# Altium PCB Pulse_plus_gen.PcbDoc
Units mil, origin at the board's own origin, x right, y up, seen from the top; angles counter-clockwise.
Board outline 3152.56 x 2155.51 mil, 2 copper layers (Top Layer, Bottom Layer); 20 components, 6 nets, 48 pads, 78 vias.
Unrouted connection lines stored in the file: 15.
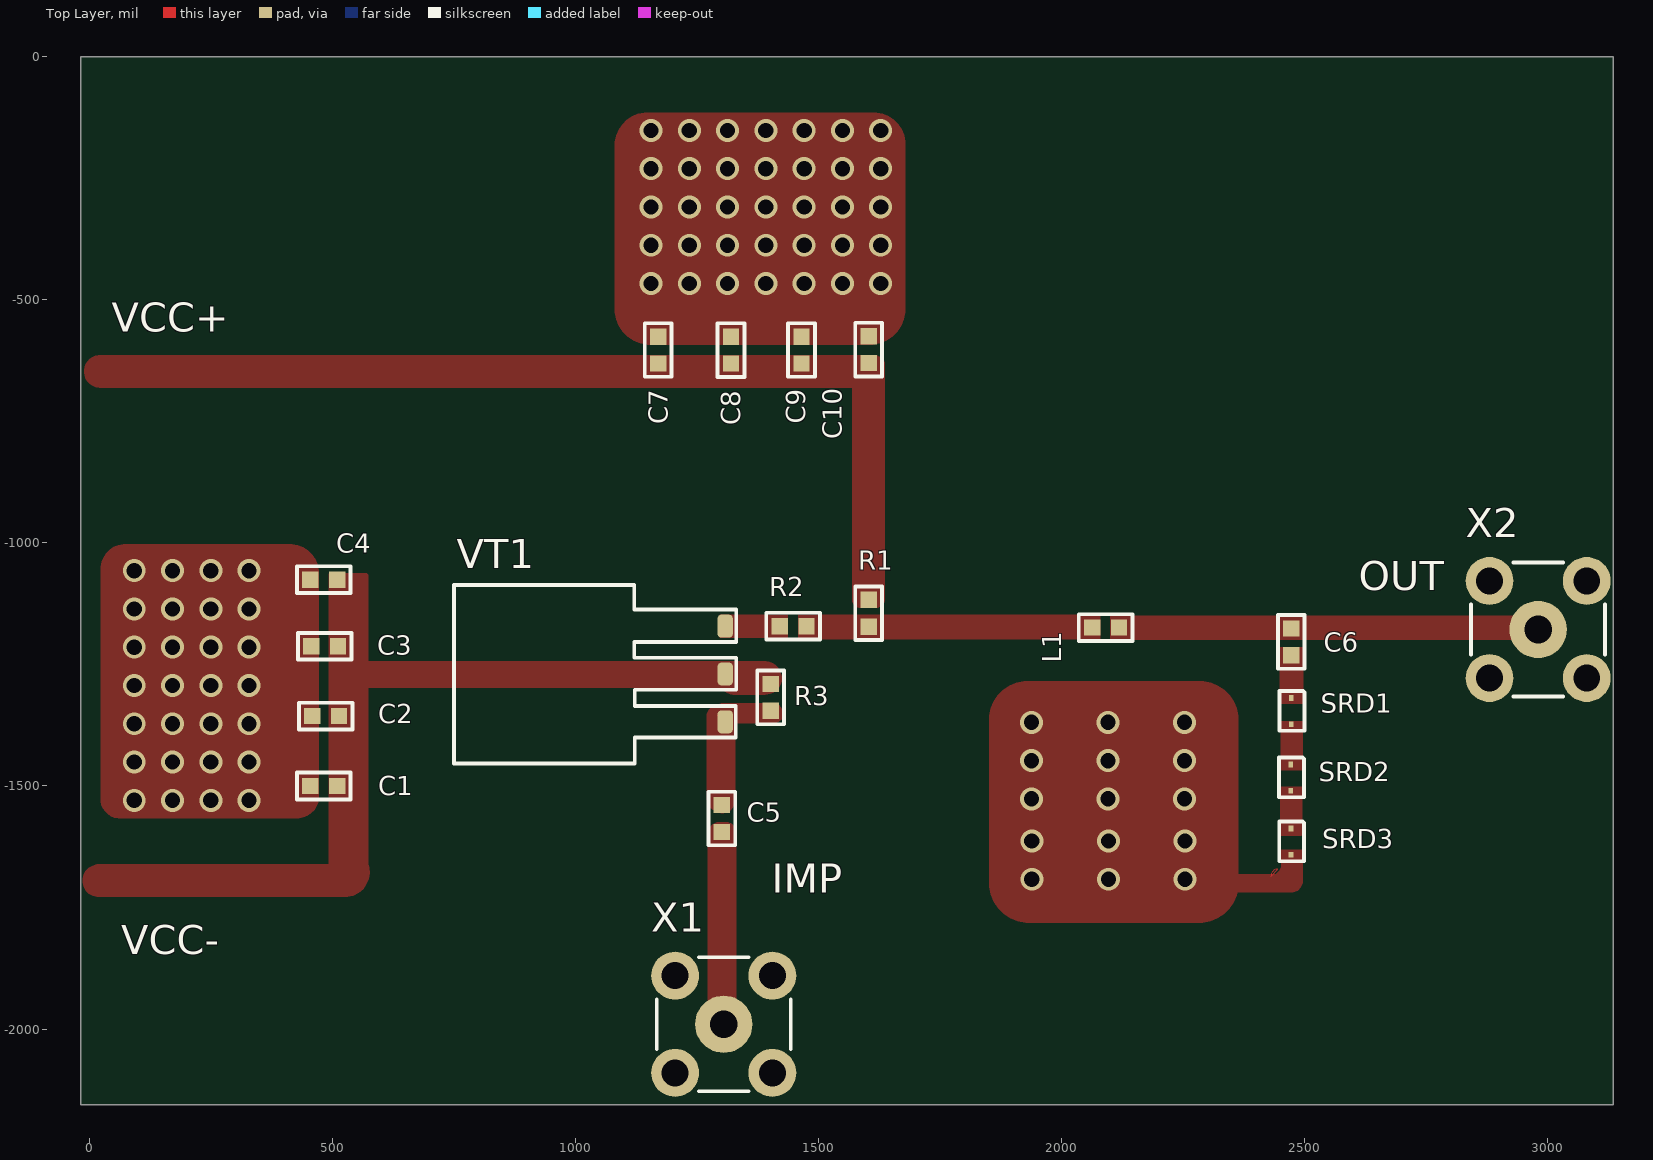
[diagram p0: Top Layer view]
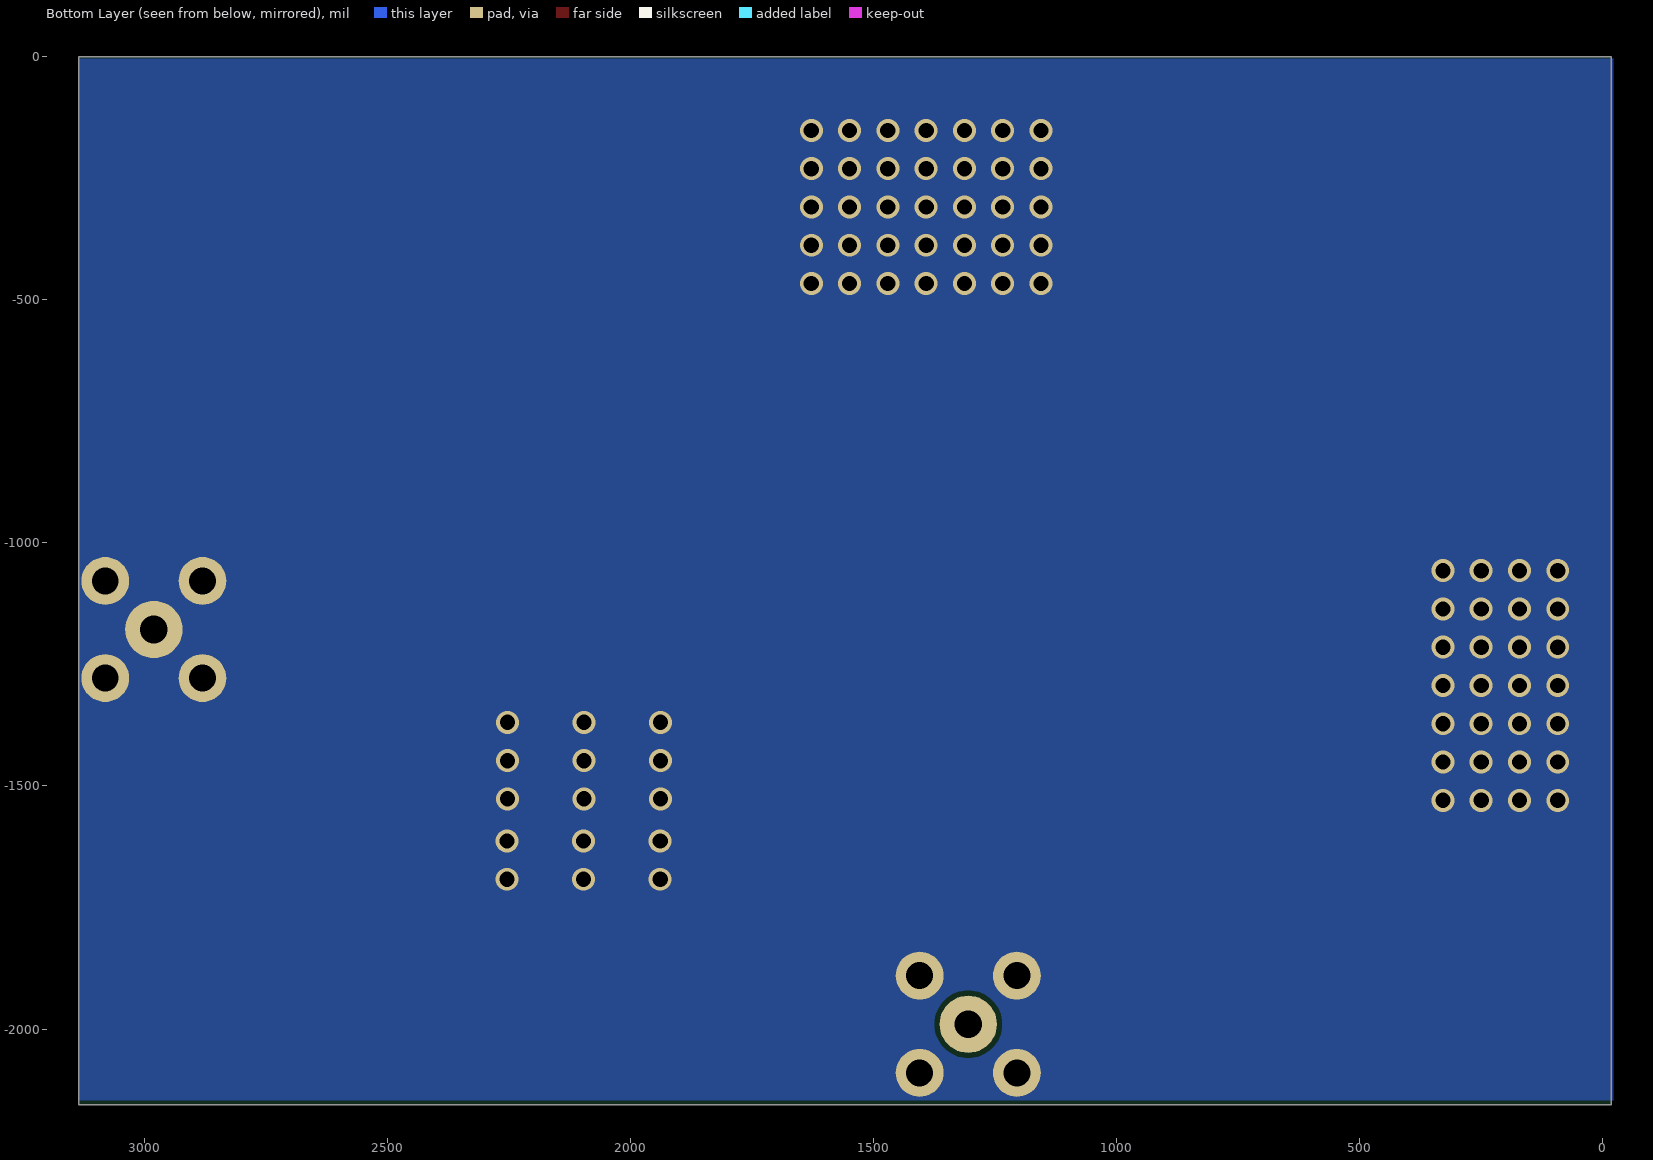
[diagram p1: Bottom Layer view, seen from below]
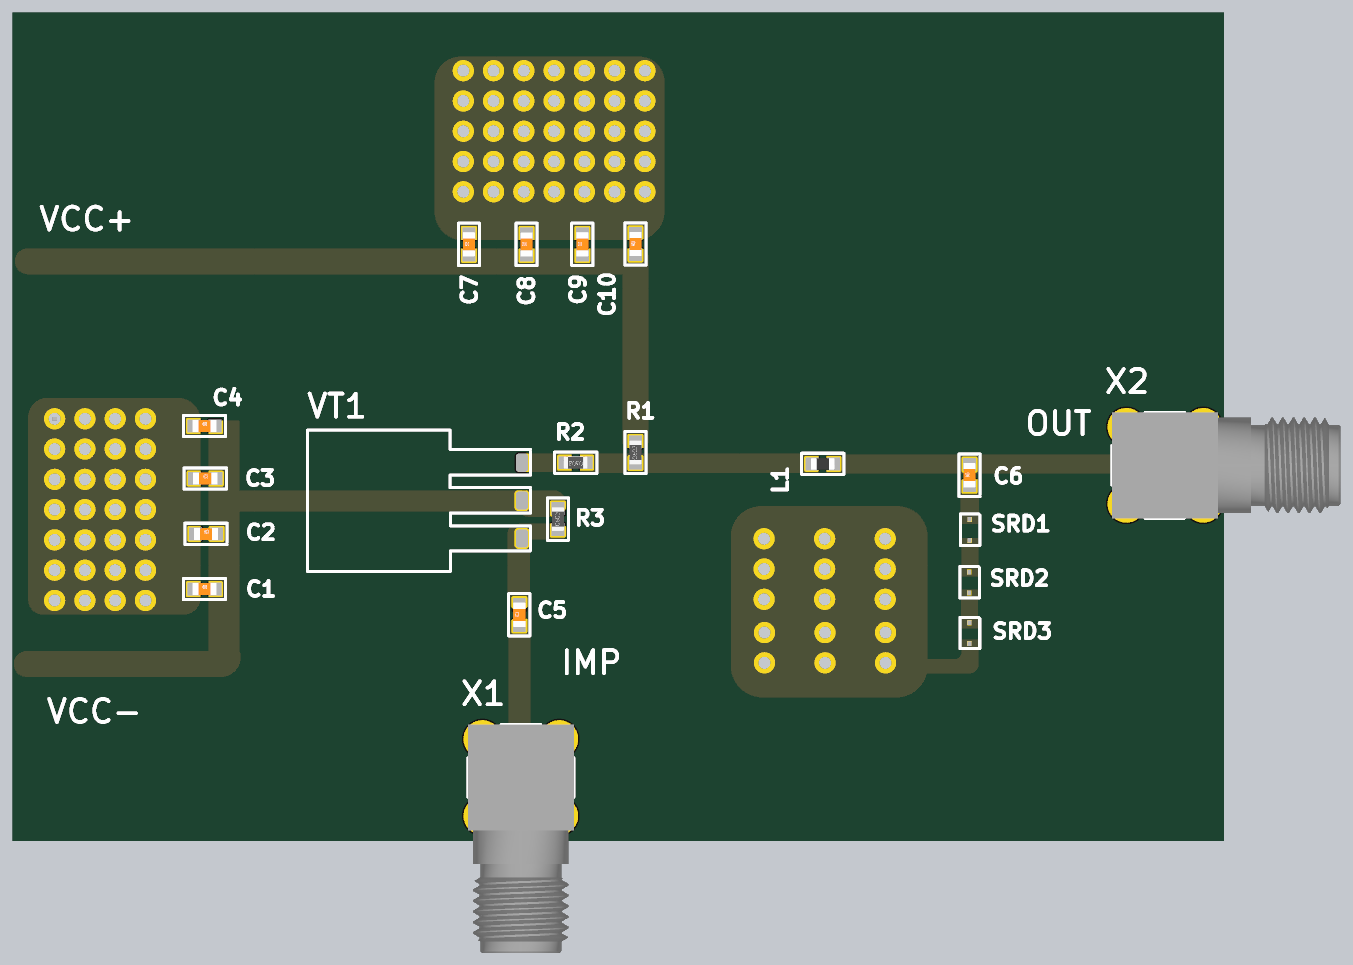
[diagram p2: 3D render of the assembled board from above, using the file's embedded part models]

## Layer stack, top to bottom
Top Solder: solder mask 0.4, Solder Resist, Dk 3.5
Top Layer: signal copper 1.4
Dielectric 1: dielectric 12.6, FR-4, Dk 4.8
Bottom Layer: signal copper 1.4
Bottom Solder: solder mask 0.4, Solder Resist, Dk 3.5

## Board outline
3134.84,0 3134.84,-2155.51 -17.72,-2155.51 -17.72,0

## Design rules (kind name [scope] priority, off if disabled: settings)
Clearance [All] p1: gap=10 ignorepadtopadclearanceinfootprint=FALSE except(0: Arc-Hole Track-Hole SMDPad-Hole THPad-Hole Via-Hole Fill-Hole Poly-Hole Region-Hole Text-Hole)
PlaneConnect [All] p1: planeconnectstyle=Direct reliefexpansion=20 reliefentries=4 reliefconductorwidth=10 reliefairgap=10
PolygonConnect [All] p1: connectstyle=Direct reliefconductorwidth=10 reliefentries=4 polygonreliefangle="90 Angle" airgapwidth=10
RoutingVias [All] p1: holewidth=28 width=50 viastyle="Through Hole" minholewidth=28 minwidth=50 maxholewidth=28 maxwidth=50
SolderMaskExpansion [All] p1: expansion=4 istentingtop=FALSE
Width [All] p1: maxlimit=10 minlimit=10 preferedwidth=10
29 further rules are at their usual default settings.

## Classes and differential pairs
component class Scheme: 1 2 C1 C2 C3 C4 C5 C6 C7 C8 C9 C10 L1 R1 SRD1 VT1 X1 X2

## Components (designator, comment, footprint, x,y, rotation, side; value= is the part's Value field where it differs from the comment)
C1 "100 пФ" CH0603C 482.28,-1500 r0 top value="50 нФ"
C2 "1 нФ" CH0603C 486.22,-1356.3 r0 top value="50 нФ"
C3 "100 нФ" CH0603C 484.25,-1212.6 r0 top value="50 нФ"
C4 "1 мФ" CH0603C 482.28,-1075.79 r0 top value="50 нФ"
C5 "50нФ" CH0603C 1301.18,-1566.93 r90 top value="100 нФ"
C6 "20 пФ" CH0603C 2472.44,-1203.74 r90 top value="100 нФ"
C7 "100 пФ" CH0603C 1170.12,-603.31 r90 top value="50 нФ"
C8 "1 нФ" CH0603C 1320.12,-603.43 r90 top value="50 нФ"
C9 "100 нФ" CH0603C 1465.12,-603.31 r90 top value="50 нФ"
C10 "1 мФ" CH0603C 1603.35,-602.36 r90 top value="50 нФ"
L1 "20 нГн" CH0603L 2090.55,-1174.21 r0 top
R1 "27 Ом" CH0603R 1603.35,-1144.69 r90 top value="50 Ом"
R2 "20 Ом" CH0603R 1447.83,-1171.26 r180 top value="50 Ом" (schematic designator R1)
R3 "51 Ом" CH0603R 1401.57,-1317.91 r90 top value="50 Ом" (schematic designator R1)
SRD1 "SRD" "PCBComponent_1 - duplicate" 2472.83,-1345.96 r270 top
SRD2 "SRD" "PCBComponent_1 - duplicate" 2471.85,-1482.78 r270 top (schematic designator SRD1)
SRD3 "SRD" "PCBComponent_1 - duplicate" 2472.34,-1614.67 r270 top (schematic designator SRD1)
VT1 "RD15HVF1" TO220_123 1310.04,-1269.69 r90 top
X1 "SMA" "CON: SMA-R" 1305.12,-1990.16 r180 top
X2 "SMA" "CON: SMA-R" 2980.32,-1178.15 r270 top

## Footprints (in the part's own frame and the unit in brackets; to place one, negate y for a bottom-side part, rotate by r counter-clockwise, add the part's x,y. Pads: shape width x height; smd on the part's side, far side on the other; paste and mask are expansions set on the pad)
CH0603C [mm] "Chip Capacitor, 2-Leads, Body 1,53x0,85mm, IPC Medium Density"
  rect 0.85x0.85 smd: 1(-0.7,0) 2(0.7,0)
  silkscreen extent -1.4,-0.7 1.4,0.7, body extent -0.8,-0.4 0.8,0.4, height 0.3
CH0603L [mm]
  rect 0.85x0.85 smd: 1(-0.7,0) 2(0.7,0)
  silkscreen extent -1.4,-0.7 1.4,0.7, body extent -0.8,-0.4 0.8,0.4, height 0.8
CH0603R [mm]
  rect 0.85x0.85 smd: 1(-0.7,0) 2(0.7,0)
  silkscreen extent -1.4,-0.7 1.4,0.7, body extent -0.8,-0.4 0.8,0.4, height 0.44
"CON: SMA-R" [mm]
  round 3 hole 1.45: 1(0,0)
  round 2.5 hole 1.4: 2(-2.54,2.54) 2(-2.54,-2.54) 2(2.54,2.54) 2(2.54,-2.54)
  silkscreen extent -3.5,-3.5 3.5,3.5, body extent -3.5,-3.5 3.5,11.6, height 10.26
"PCBComponent_1 - duplicate" [mm]
  rect 0.3x0.25 smd mask+0.02: 1(-0.688,-0.01) 2(0.687,-0.01)
  silkscreen extent -1.05,-0.63 1.03,0.67
TO220_123 [mm] "Generic TO-220 case, stay variant"
  rrect50% 1.2x0.8 smd: 1(-2.5,0.05) 2(0,0.05) 3(2.5,0.05)
  silkscreen extent -4.67,-0.53 4.65,14.23

## Part data
C1 C2 C3 C4 C7 C8 C9 C10: library part Capacitor
C5 C6: library part Capacitor_1
L1: library part Inductor
R1 R2 R3: library part Resistor_1
SRD1 SRD2 SRD3: "https://ru.mouser.com/datasheet/2/249/maom_s_a0004987266_1-2274246.pdf"
VT1: library part "P-chanel -diod", "Mosfet", HelpURL=http://www.mitsubishielectric.com/semiconductors/content/product/highfrequency/siliconrf/discrete/rd15hvf1.pdf, Model=RD15HVF1
X1 X2: "RF"

## Free pads (board coordinates)
  rect 11.81x9.84 smd: ?(92.52,-1057.09)

## Via types
v1: diameter 47.24, hole 31.5, Top Layer to Bottom Layer, 78 vias

## Nets (pads, with @x,y where several pads share a name; then routed paths per layer and width w, separated by ;. In a path a pad name is that pad's centre, name@x,y a point inside that pad or via, vN(x,y) a via of type N, cw(c..) or ccw(c..) an arc to the next point about the centre after c; other vN are vias at no path point)
GND: C1.1 C2.1 C3.1 C4.1 C7.2 C8.2 C9.2 C10.2 pad.? SRD3.2 X1.2 X2.2
  other v1: 1938.98,-1691.93 2096.46,-1691.93 2253.94,-1691.93 1938.98,-1613.19 2096.46,-1613.19 2253.94,-1613.19 92.52,-1529.53 171.26,-1529.53 250,-1529.53 328.74,-1529.53 1937.99,-1526.57 2095.47,-1526.57 2252.95,-1526.57 92.52,-1450.79 171.26,-1450.79 250,-1450.79 328.74,-1450.79 1937.99,-1447.83 2095.47,-1447.83 2252.95,-1447.83 92.52,-1372.05 171.26,-1372.05 250,-1372.05 328.74,-1372.05 1937.99,-1369.09 2095.47,-1369.09 2252.95,-1369.09 92.52,-1293.31 171.26,-1293.31 250,-1293.31 328.74,-1293.31 92.52,-1214.57 171.26,-1214.57 250,-1214.57 328.74,-1214.57 92.52,-1135.83 171.26,-1135.83 250,-1135.83 328.74,-1135.83 92.52,-1057.09 171.26,-1057.09 250,-1057.09 328.74,-1057.09 1155.51,-466.54 1234.25,-466.54 1312.99,-466.54 1391.73,-466.54 1470.47,-466.54 1549.21,-466.54 1627.95,-466.54 1155.51,-387.8 1234.25,-387.8 1312.99,-387.8 1391.73,-387.8 1470.47,-387.8 1549.21,-387.8 1627.95,-387.8 1155.51,-309.06 1234.25,-309.06 1312.99,-309.06 1391.73,-309.06 1470.47,-309.06 1549.21,-309.06 1627.95,-309.06 1155.51,-230.31 1234.25,-230.31 1312.99,-230.31 1391.73,-230.31 1470.47,-230.31 1549.21,-230.31 1627.95,-230.31 1155.51,-151.57 1234.25,-151.57 1312.99,-151.57 1391.73,-151.57 1470.47,-151.57 1549.21,-151.57 1627.95,-151.57
IMP: C5.1 C5.2 R3.1 VT1.1 X1.1
NetVD1_2: 
OUT: C6.1 C6.2 L1.1 L1.2 R1.1 R2.1 R2.2 SRD1.1 SRD1.2 SRD2.1 SRD2.2 SRD3.1 VT1.3 X2.1
VCC+: C7.1 C8.1 C9.1 C10.1 R1.2
VCC-: C1.2 C2.2 C3.2 C4.2 R3.2 VT1.2

## Polygon pours and split planes (outlines as drawn)
VCC- on Top Layer "VCC-_L01_P063" (solid, pour order 63): 1319.87,-1243.11 1388.78,-1243.11 cw(c1388.78,-1278.54) 1424.21,-1278.54 cw(c1390.75,-1278.54) 1390.75,-1312.01 1325.96,-1312.01 cw(c1325.96,-1285.15) 1299.11,-1284.76 1299.42,-1263.27 cw(c1319.87,-1263.56)
no net on Top Layer "NONET_L01_P061" (solid, pour order 61): 1292.32,-1355.31 1292.32,-1354.33 1293.31,-1354.33
IMP on Top Layer "IMP_L01_P060" (solid, pour order 60): 1304.46,-1329.73 1405.51,-1329.72 cw(c1405.51,-1351.38) 1427.17,-1351.38 cw(c1407.48,-1351.38) 1407.48,-1371.06 1279.53,-1371.06 1280.02,-1353.49 cw(c1304.46,-1354.17)
VCC- on Top Layer "VCC-_L01_P059" (solid, pour order 59): 1314.96,-1240.16 1314.96,-1243.11 554.13,-1243.11 554.13,-1298.23 1315.94,-1298.23
OUT on Top Layer "OUT_L01_P058" (solid, pour order 58): 2862.7,-1149.61 2862.7,-1198.82 3003.94,-1198.82 3003.94,-1149.61
IMP on Top Layer "IMP_L01_P057" (solid, pour order 57): 1328.74,-1354.51 1328.74,-1529.35 cw(c1302.12,-1529.35) 1302.12,-1555.98 cw(c1302.12,-1524.53) 1270.67,-1524.53 1270.67,-1356.17 cw(c1293.31,-1356.17) 1293.31,-1333.54 1307.77,-1333.54 cw(c1307.77,-1354.5)
IMP on Top Layer "IMP_L01_P056" (solid, pour order 56): 1330.71,-1595.77 1330.71,-1996.06 1272.64,-1996.06 1272.64,-1597.44 cw(c1295.28,-1597.44) 1295.28,-1574.8 1309.74,-1574.8 cw(c1309.74,-1595.77)
GND on Top Layer "GND_L01_P053" (solid, pour order 53): 2352.36,-1719.12 2471.82,-1719.12 ccw(c2471.82,-1694.88) 2496.06,-1694.88 2496.06,-1630.91 2451.77,-1630.91 2450.79,-1653.54 cw(c2431.54,-1661.84) 2437.22,-1682.01 2352.36,-1682.01
GND on Top Layer "NONET_L01_P052" (solid, shelved, pour order 52): 2444.78,-1671.16 ccw(c2444.78,-1684.94) 2431,-1684.94 2431,-1685.92
GND on Top Layer "GND_L01_P019" (solid, pour order 19): 1930.12,-1284.45 2284.45,-1284.45 cw(c2284.45,-1363.19) 2363.19,-1363.19 2363.19,-1700.79 cw(c2282.48,-1700.79) 2282.48,-1781.5 1934.06,-1781.5 cw(c1934.06,-1698.82) 1851.38,-1698.82 1851.38,-1363.19 cw(c1930.11,-1363.19)
VCC+ on Top Layer "VCC+_L01_P012" (solid, pour order 12): 1619.09,-1133.37 1585.63,-1133.37 cw(c1585.63,-1117.62) 1569.88,-1117.62 1569.88,-631.4 cw(c1586.61,-631.4) 1586.61,-614.66 1617.13,-614.66 cw(c1617.13,-634.35) 1636.81,-634.35 1636.81,-1115.65 cw(c1619.1,-1115.65)
VCC+ on Top Layer "VCC+_L01_P013" (solid, pour order 13): 1621.04,-614.66 1620.55,-614.17 1148.62,-614.17 ccw(c1148.62,-624.02) 1138.78,-624.02 1138.78,-663.39 ccw(c1146.65,-663.39) 1146.65,-671.26 1621.06,-671.26
VCC- on Top Layer "VCC-_L01_P015" (solid, pour order 15): 492.25,-1062.12 493.11,-1062.98 493.11,-1657.48 ccw(c538.39,-1663.39) 532.48,-1708.66 ccw(c530.18,-1665.03) 573.88,-1665.03 573.88,-1062.01
GND on Top Layer "GND_L01_P016" (solid, pour order 16): 1155.02,-592.52 1604.82,-592.52 ccw(c1604.82,-518.7) 1678.64,-518.7 1678.64,-180.12 ccw(c1613.68,-180.12) 1613.68,-115.16 1148.13,-115.16 ccw(c1148.12,-182.08) 1081.2,-182.09 1081.2,-518.7 ccw(c1155.02,-518.7)
GND on Top Layer "GND_L01_P018" (solid, pour order 18): 472.44,-1063.48 472.44,-1521.16 cw(c427.17,-1521.16) 427.17,-1566.44 62.99,-1566.44 cw(c62.99,-1527.07) 23.62,-1527.07 23.62,-1053.64 cw(c74.8,-1053.64) 74.8,-1002.46 411.42,-1002.46 cw(c411.42,-1063.48)
VCC- on Top Layer "VCC-_L01_P023" (solid, pour order 23): 573.82,-1661.45 cw(c525.36,-1677.38) 525.35,-1728.38 19.69,-1728.38 cw(c19.68,-1694.92) 19.68,-1661.45
VCC+ on Top Layer "VCC+_L01_P024" (solid, pour order 24): 1146.66,-614.17 21.65,-614.17 ccw(c21.65,-646.65) -10.83,-646.65 ccw(c23.62,-646.65) 23.62,-681.1 1582.68,-681.1 1583.29,-680.49 1583.29,-614.66 1147.16,-614.66
OUT on Top Layer "OUT_L01_P037" (solid, pour order 37): 1297.24,-1147.64 1437.01,-1147.64 1437.01,-1194.88 1297.24,-1194.88
OUT on Top Layer "OUT_L01_P038" (solid, pour order 38): 1458.66,-1147.64 2079.72,-1147.64 2079.72,-1197.83 1460.63,-1197.83 1458.66,-1195.87
OUT on Top Layer "OUT_L01_P040" (solid, pour order 40): 2099.9,-1198.82 2862.7,-1198.82 2862.7,-1149.61 2099.9,-1149.61
OUT on Top Layer "OUT_L01_P041" (solid, pour order 41): 2448.82,-1215.55 2449.8,-1214.57 2497.05,-1214.57 2497.05,-1329.72 2496.06,-1330.71 2448.82,-1330.71 2448.82,-1214.57
OUT on Top Layer "OUT_L01_P042" (solid, pour order 42): 2496.06,-1367.13 2496.06,-1465.55 2494.09,-1467.52 2450.79,-1467.52 2450.79,-1367.13
OUT on Top Layer "OUT_L01_P043" (solid, pour order 43): 2494.94,-1501.66 2494.94,-1600.09 2492.97,-1602.05 2449.66,-1602.05 2449.66,-1501.66
GND on Bottom Layer "GND_L02_P055" (solid, pour order 55): -26.57,-3.94 3134.84,-3.94 3134.84,-2146.65 -21.65,-2146.65 -21.65,6.89 0,6.89

## Silkscreen, mask and mechanical layers (free items; w line width, h text height)
Top Overlay:
  text "VCC+" at 46.42,-565.79 h60
  text "OUT" at 2611.38,-1097.28 h60
  text "IMP" at 1403.7,-1719.33 h60
  text "VCC-" at 66.1,-1846.3 h60